# EAGLE board atum-le (EAGLE 6.5.0)
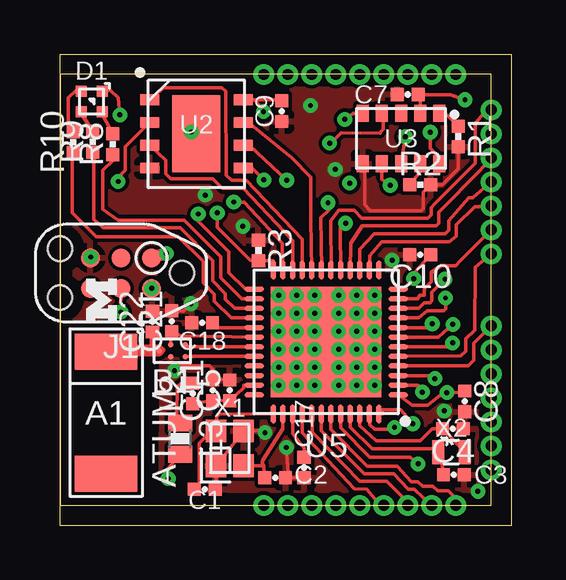
[diagram p0: board, top side]
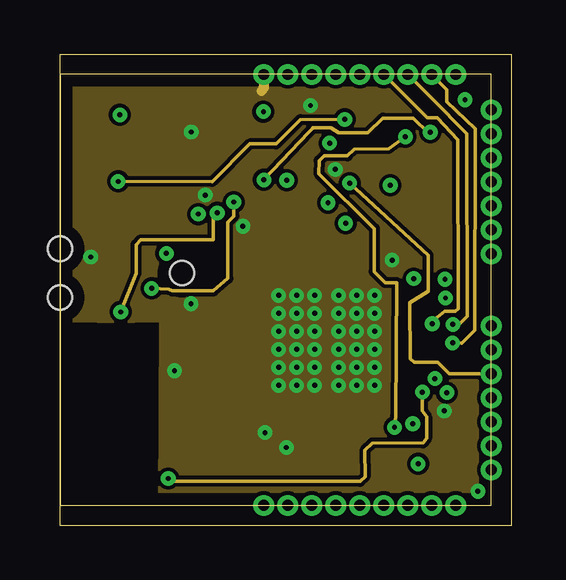
[diagram p1: board, inner layer Route2]
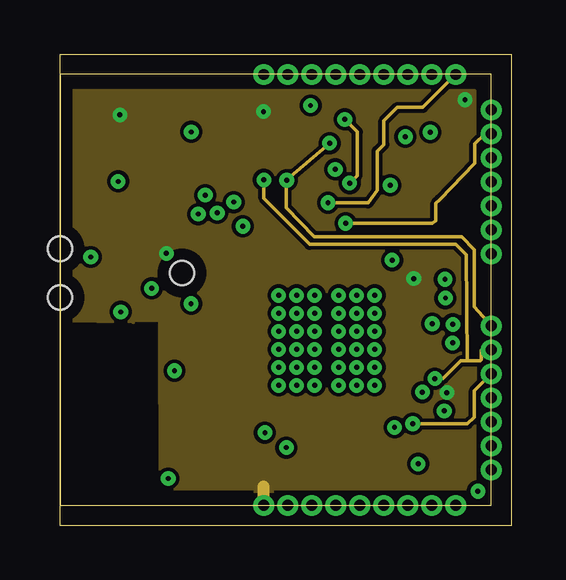
[diagram p2: board, inner layer Route15]
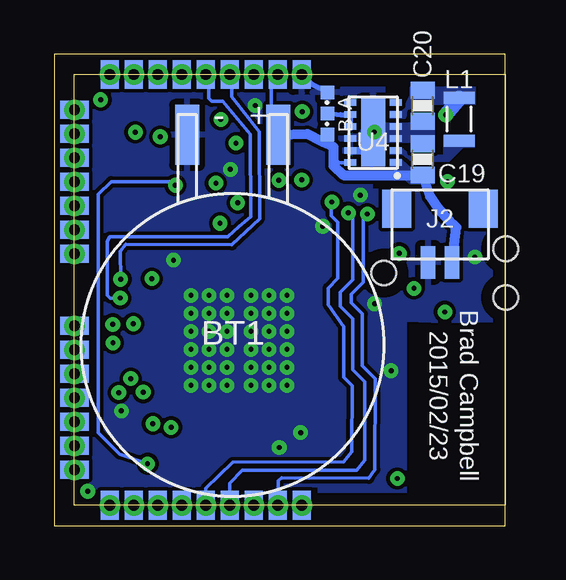
[diagram p3: board, bottom side, seen from below]

Size 17.96 x 17.96 mm. Coordinates in mm from the lower left corner, seen from the top.
Outline: 0,0 17.96,0 17.96,17.96 0,17.96 0,0
Copper layers (1+2*15+16): Top 0.0178mm / dielectric 12mil / Route2 0.0356mm / dielectric 28mil / Route15 0.0356mm / dielectric 12mil / Bottom 0.0178mm
Design rules "sunstone-4lyr_v1.0.0.3": minimum track width 6mil, minimum drill 8mil, track to track 6mil, track to pad 6mil, pad to pad 6mil, via to via 6mil, smd to smd 6mil, copper to edge 20mil, drill to drill 16mil, minimum pad ring 8mil, minimum via ring 8mil, stop-mask expansion 3mil, vias tented up to drill 0mil, thermal gap 10mil
Milling: 4 lines

## Footprints (pad centres in the part's own frame; a part is rotated, then mirrored left to right if it is on the bottom)
FRACTUS-ANTENNA-FR05-S1-N-0-102 = smd 1.5 x 2.6: 1 -2.55,0; 2 2.55,0
BAL-NRF01D3 = smd 0.22 x 0.22: ANT1 -0.537,-0.25; ANT2 -0.537,0.25; GND 0.069,0.25; SE 0.537,0; VCC 0.069,-0.25
ML-1220/F1BN = smd 2.5 x 1: NEG 8.75,1.9; POS 8.75,-1.9
0402_CAP = smd 0.536 x 0.546: 1 -0.433,0; 2 0.433,0
0603_CAP = smd 0.7 x 1: 1 -0.65,0; 2 0.65,0
1MM_SQ_4PAD = smd 0.457 x 0.457: 1 0.432,0.432; 2 0.432,-0.432; 3 -0.432,-0.432; 4 -0.432,0.432
TC2030-IDC-NL = smd 0.787 x 0.787: 1 -1.27,-0.635; 2 -1.27,0.635; 3 0,-0.635; 4 0,0.635; 5 1.27,-0.635; 6 1.27,0.635 | hole 1.016: -2.54,0; 2.54,1.016; 2.54,-1.016
SH-1X2/1MM = smd 0.6 x 1.35: 1 -0.5,0.1; 2 0.5,0.1 | smd 1.2 x 1.6: SUPPORT1 -1.8,2.335; SUPPORT2 1.8,2.335
ATUM-HEADER = drill 0.45 pad 0.754: 1 -9.479,-8.979; 2 -8.479,-8.979; 3 -7.479,-8.979; 4 -6.479,-8.979; 5 -5.479,-8.979; 6 -4.479,-8.979; 7 -3.479,-8.979; 8 -2.479,-8.979; 9 -1.479,-8.979; 10 0,-7.5; 11 0,-6.5; 12 0,-5.5; 13 0,-4.5; 14 0,-3.5; 15 0,-2.5; 16 0,-1.5; 17 0,1.5; 18 0,2.5; 19 0,3.5; 20 0,4.5; 21 0,5.5; 22 0,6.5; 23 0,7.5; 24 -1.479,8.979; 25 -2.479,8.979; 26 -3.479,8.979; 27 -4.479,8.979; 28 -5.479,8.979; 29 -6.479,8.979; 30 -7.479,8.979; 31 -8.479,8.979; 32 -9.479,8.979 | smd 0.754 x 1.2 bottom: 1B -9.479,-8.979; 2B -8.479,-8.979; 3B -7.479,-8.979; 4B -6.479,-8.979; 5B -5.479,-8.979; 6B -4.479,-8.979; 7B -3.479,-8.979; 8B -2.479,-8.979; 9B -1.479,-8.979; 24B -1.479,8.979; 25B -2.479,8.979; 26B -3.479,8.979; 27B -4.479,8.979; 28B -5.479,8.979; 29B -6.479,8.979; 30B -7.479,8.979; 31B -8.479,8.979; 32B -9.479,8.979 | smd 1.2 x 0.754 bottom: 10B 0,-7.5; 11B 0,-6.5; 12B 0,-5.5; 13B 0,-4.5; 14B 0,-3.5; 15B 0,-2.5; 16B 0,-1.5; 17B 0,1.5; 18B 0,2.5; 19B 0,3.5; 20B 0,4.5; 21B 0,5.5; 22B 0,6.5; 23B 0,7.5
MIPSZ201D = smd 0.5 x 1.3: 1 -0.9,0; 2 0.9,0
0402_RES = smd 0.536 x 0.546: 1 -0.433,0; 2 0.433,0
TDFN-8 = smd 0.45 x 0.8: 1 -1.425,-1.95; 2 -0.475,-1.95; 3 0.475,-1.95; 4 1.425,-1.95; 5 1.425,1.95; 6 0.475,1.95; 7 -0.475,1.95; 8 -1.425,1.95 | smd 3.2 x 2: NC 0,0
MICRO-CRYSTAL-C3 = smd 0.5 x 0.7: 1 -1.6,-1.05; 2 -0.8,-1.05; 3 0,-1.05; 4 0.8,-1.05; 5 1.6,-1.05; 6 1.6,1.05; 7 0.8,1.05; 8 0,1.05; 9 -0.8,1.05; 10 -1.6,1.05
R-PWSON-12 = smd 0.28 x 0.5: 1 -1.25,-0.95; 2 -0.75,-0.95; 3 -0.25,-0.95; 4 0.25,-0.95; 5 0.75,-0.95; 6 1.25,-0.95; 7 1.25,0.95; 8 0.75,0.95; 9 0.25,0.95; 10 -0.25,0.95; 11 -0.75,0.95; 12 -1.25,0.95 | smd 2.8 x 1: NC 0,0
QFN-48-6MM = smd 0.8 x 0.203: 1 -3,2.2; 2 -3,1.8; 3 -3,1.4; 4 -3,1; 5 -3,0.6; 6 -3,0.2; 7 -3,-0.2; 8 -3,-0.6; 9 -3,-1; 10 -3,-1.4; 11 -3,-1.8; 12 -3,-2.2; 25 3,-2.2; 26 3,-1.8; 27 3,-1.4; 28 3,-1; 29 3,-0.6; 30 3,-0.2; 31 3,0.2; 32 3,0.6; 33 3,1; 34 3,1.4; 35 3,1.8; 36 3,2.2 | smd 0.203 x 0.8: 13 -2.2,-3; 14 -1.8,-3; 15 -1.4,-3; 16 -1,-3; 17 -0.6,-3; 18 -0.2,-3; 19 0.2,-3; 20 0.6,-3; 21 1,-3; 22 1.4,-3; 23 1.8,-3; 24 2.2,-3; 37 2.2,3; 38 1.8,3; 39 1.4,3; 40 1,3; 41 0.6,3; 42 0.2,3; 43 -0.2,3; 44 -0.6,3; 45 -1,3; 46 -1.4,3; 47 -1.8,3; 48 -2.2,3 | smd 4.6 x 4.6: GND 0,0
RES_SWITCH = smd 0.56 x 0.56: A -0.88,0; B 0.88,0; C 0,0
FA-128 = smd 0.95 x 0.85: 1 -0.725,-0.575; 2 0.725,-0.575; 3 0.725,0.575; 4 -0.725,0.575
ABS05 = smd 0.5 x 1: A -0.55,0; B 0.55,0

## Placement (x,y rotation side)
A1  FRACTUS-2.4GHZ-FR05-S1-N-0-102  [FRACTUS-ANTENNA-FR05-S1-N-0-102]  1.91,3.86 270 top
B1  BAL-NRF01D3  [BAL-NRF01D3]  4.67,6.44 180 top
BT1  ML-1220/F1AN  [ML-1220/F1BN]  11.36,6.69 90 bottom
C1  12pF  [0402_CAP]  6.02,0.68 0 top
C2  12pF  [0402_CAP]  8.95,1.15 0 top
C3  22pF  [0402_CAP]  16.4,1.27 0 top
C4  22pF  [0402_CAP]  16.36,3.2 0 top
C5  1nF  [0402_CAP]  7.07,4.79 90 top
C7  10nF  [0402_CAP]  14.48,17.12 180 top
C8  0.1uF  [0402_CAP]  16.85,4.33 270 top
C9  0.1uF  [0402_CAP]  9.23,16.43 270 top
C10  4.7uF  [0402_CAP]  15,10.44 180 top
C11  1uF  [0402_CAP]  6.36,4.79 90 top
C17  1nF  [0402_CAP]  10.16,1.58 270 top
C18  47nF  [0402_CAP]  5.91,7.62 180 top
C19  10uF  [0603_CAP]  3.45,14.42 90 bottom
C20  10uF  [0603_CAP]  3.45,16.65 270 bottom
C21  2.2nF  [0402_CAP]  4.65,7.67 90 top
C22  0.8pF  [0402_CAP]  3.84,7.66 90 top
D1  SML-LX0404SIUPGUSB  [1MM_SQ_4PAD]  1.31,16.83 0 top
J1  TC2030-JLINK-NL  [TC2030-IDC-NL]  2.53,9.68 180 top
J2  SH_MALE_2/1MM  [SH-1X2/1MM]  2.72,10.03 0 bottom
J3  ATUM-HEADER  [ATUM-HEADER]  17.96,8.98 0 top
L1  2.2  [MIPSZ201D]  1.93,16.09 90 bottom
L2  [0402_CAP]  5.52,4.66 90 top
L3  [0603_CAP]  4.99,2.78 270 top
LOGO1  UMICH_SOLID_TINY  [UMICH_SOLID_50MIL]  1.73,8.56 90 top
R1  10k  [0402_RES]  16.58,15.37 270 top
R2  10k  [0402_RES]  15,13.36 0 top
R3  12k  [0402_RES]  8.26,10.62 270 top
R8  1k  [0402_RES]  2.18,15.05 90 top
R9  1k  [0402_RES]  1.36,15.15 90 top
R10  1k  [0402_RES]  0.55,15.13 90 top
U2  FM25LBTDFN-8  [TDFN-8]  5.68,15.48 270 top
U3  RV-3049-C3  [MICRO-CRYSTAL-C3]  14.2,15.29 180 top
U4  TPS62740  [R-PWSON-12]  5.51,15.53 90 bottom
U5  NRF51822QF  [QFN-48-6MM]  11.08,6.81 180 top
U$1  RES_SWITCH  [RES_SWITCH]  7.41,16.33 270 bottom
X1  EPSON-FA-128  [FA-128]  7.07,2.38 270 top
X2  ABS05-32.768KHZ-T  [ABS05]  16.29,2.22 0 top

## Library data of the parts
A1 = chips; RICHARDSON_RFPD: FR05-S1-N-0102B
B1 = chips; DIGIKEY: 497-13637-1-ND; MOUSER: 511-BAL-NRF01D3
BT1 = batteries; DIGIKEY: P663-nd; MOUSER: 658-ML-1220/F1BN
C1-C5 C7-C11 C17 C18 C21 C22 L1-L3 R1-R3 R8-R10 = passives
C19 C20 = passives; DIGIKEY: 490-7316-1-ND
D1 = leds; DIGIKEY: 67-2125-1-ND
J1 = connector
J2 = headers; DIGIKEY: 455-1788-2-ND
J3 = atum
LOGO1 = logos
U2 = chips; DIGIKEY: FM25L04B-DGRA-ND; MOUSER: 877-FM25L04B-DG
U3 = chips
U4 = chips; DIGIKEY: 296-37134-1-ND; MOUSER: 595-TPS62740DSST; NEWARK: 27X9745
U5 = chips; DIGIKEY: 1490-1032-1-ND; MOUSER: 949-NRF51822-QFAB-R7
U$1 = switches
X1 = crystals
X2 = crystals; DIGIKEY: 535-11899-1-ND

## Nets
!FRAM_CS: U2.1 U5.21
!FRAM_HOLD: U2.7 U5.20
!FRAM_WP: U2.3 U5.22
!RTC_INT: U3.7 U5.44
AIN3: J3.25 J3.25B U5.6
AIN4: J3.26 J3.26B U5.7
AIN5: J3.27 J3.27B U5.8
AIN6: J3.28 J3.28B U5.9
AIN7: J3.29 J3.29B U5.10
ANTENNA: A1.1 B1.SE C22.1
BATTERY: BT1.POS C19.1 J2.2 J3.31 J3.31B U4.1 U4.12 U$1.B
BOOTLOADER_CTRL: J3.24 J3.24B U5.19
BOOTLOADER_RX: J3.22 J3.22B U5.17
BOOTLOADER_TX: J3.23 J3.23B U5.18
GND: B1.GND BT1.NEG C1.2 C2.2 C3.2 C4.2 C5.2 C7.2 C8.2 C9.2 C10.2 C11.2 C17.2 C18.2 C19.2 C20.2 C21.2 C22.2 J1.5 J2.1 J3.32 J3.32B R1.2 R2.2 R3.1 U2.4 U3.6 U4.3 U4.4 U4.10 U4.11 U4.NC U$1.A X1.2 X1.4
I2C_SCL: J3.17 J3.17B U5.5
I2C_SDA: J3.18 J3.18B U5.11
LED_BLUE: R9.1 U5.27
LED_GREEN: R10.1 U5.28
LED_RED: R8.1 U5.26
N$1: J3.30 J3.30B
N$5: L1.1 U4.2
N$6: C3.1 U5.45 X2.A
N$7: D1.2 R8.2
N$8: U4.8 U4.9 U$1.C
N$9: C1.1 U5.37 X1.1
N$10: C2.1 U5.38 X1.3
N$11: D1.4 R10.2
N$12: D1.3 R9.2
N$13: C4.1 U5.46 X2.B
N$14: R2.1 U3.9
N$15: C18.1 U5.29
N$16: R1.1 U3.1
N$17: C17.1 U5.39
N$18: B1.ANT1 U5.31
N$19: B1.ANT2 U5.32
N$20: B1.VCC C21.1 U5.30
N$36: C5.1 C11.1 L2.1 U5.35 U5.36
N$37: L2.2 L3.1
N$38: L3.2 U5.2
P08: J3.19 J3.19B U5.14
P09: J3.20 J3.20B U5.15
P10: J3.21 J3.21B U5.16
P17: J3.2 J3.2B U5.25
P21: J3.6 J3.6B U5.40
P22: J3.7 J3.7B U5.41
P23: J3.8 J3.8B U5.42
P24: J3.9 J3.9B U5.43
RTC_CE: U3.8 U5.47
SPI_MISO: J3.14 J3.14B U2.2 U3.5 U5.48
SPI_MOSI: J3.15 J3.15B U2.5 U3.10 U5.3
SPI_SCK: J3.16 J3.16B U2.6 U3.4 U5.4
SWDCLK: J1.4 J3.4 J3.4B R3.2 U5.24
SWDIO/!RESET: J1.2 J3.5 J3.5B U5.23
VCC: C7.1 C8.1 C9.1 C10.1 C20.1 D1.1 J1.1 J3.1 J3.1B L1.2 U2.8 U3.2 U4.5 U5.1 U5.12

## Tracks (layer width: path | path; a pad name or v marks a point on that pad's centre or on a via)
!FRAM_CS
  Top 0.152: U2.1 4.31,17.41 6.72,17.41 6.9,17.25 6.91,13.76 7.14,13.55 7.76,13.54 10.08,11.08 U5.21
!FRAM_HOLD
  Top 0.152: U2.7 7.86,15.94 9.64,14.48 10.44,13.66 10.44,11.89 U5.20
!FRAM_WP
  Top 0.152: U2.3 4.39,14.37 4.39,13.82 4.6,13.61 6.35,13.61 6.76,13.21 7.62,13.21 9.68,11.02 U5.22
!RTC_INT  (via drill 0.2)
  Top 0.152: U5.44 11.68,3.23 12.9,2 14.59,2 v14.91,1.73 | v13.75,13.34 13.4,13.6 U3.7
  Bottom 0.152: v14.91,1.73 16.07,2.14 16.96,3.03 16.96,12.96 16.43,13.49 13.82,13.49 v13.75,13.34
AIN3  (via drill 0.2)
  Top 0.152: U5.6 16.11,6.61 v16.35,6.77
  Route2 0.152: J3.25B 16.11,17.32 16.11,16.81 17.29,15.7 17.27,7.29 16.72,6.76 v16.35,6.77
AIN4  (via drill 0.2)
  Top 0.152: U5.7 15.75,7.01 v16.36,7.54
  Route2 0.152: v16.36,7.54 16.62,7.55 16.95,7.88 16.93,15.48 16.55,15.88 15.87,16.57 J3.26
AIN5  (via drill 0.2)
  Top 0.152: U5.8 15.34,7.41 v15.5,7.57
  Route2 0.152: v15.5,7.57 15.5,7.68 16.02,8.08 16.46,8.08 16.59,8.2 16.57,15.24 15.71,16.15 15.29,16.15 J3.27
AIN6  (via drill 0.2)
  Top 0.152: U5.9 14.95,7.81 15.29,8.11 15.98,8.11 16.06,8.19 v16.05,8.64
  Bottom 0.152: v16.05,8.64 16.47,8.64 16.59,8.76 16.59,11 16.49,11.19 11.57,11.2 11.1,11.6 10.62,12.02 10.63,15.47 11.78,16.83 12.24,16.83 12.37,16.96 12.37,17.85 J3.28
AIN7  (via drill 0.2)
  Top 0.152: U5.10 14.93,8.21 15.16,8.44 15.41,8.44 15.48,8.52 15.48,8.89 v16.03,9.42
  Bottom 0.152: v16.03,9.42 16.04,10.58 15.82,10.88 11.4,10.85 10.24,11.95 10.25,15.57 11.4,17.03 11.4,17.88 J3.29
ANTENNA
  Top 0.254: B1.SE 4.25,6.48 4.1,6.44 | C22.1 3.84,6.44
  Top 0.5: A1.1 3.11,6.44 3.84,6.44 4.1,6.44
BATTERY
  Bottom 0.152: U4.12 6.93,14.28 7.16,14.52 | BT1.POS 9.35,16.21 9.75,16.61 9.75,17.82 J3.31B
  Bottom 0.203: U$1.B 7.39,15.34 7.59,15.14
  Bottom 0.406: BT1.POS 8.27,15.48 7.59,15.14 7.16,14.92 7.16,14.52 7.16,14.14 6.75,13.76 3.46,13.76 C19.1 3.13,12.88 2.84,12.44 2.35,11.89 2.04,11.58 J2.2
  pour Bottom (no thermals): 2.97,13.38 2.97,14.09 3.96,14.09 4.34,14.44 4.82,14.44 4.82,14.14 4.52,13.83 3.99,13.38
BOOTLOADER_CTRL  (via drill 0.2)
  Top 0.152: U5.19 10.89,9.83 10.85,11.98 11.19,12.3 11.18,12.57 v11.16,12.61
  Route15 0.152: v11.16,12.61 12.83,12.6 13.21,13.13 13.21,14.76 13.49,15.04 13.49,16.02 14.05,16.59 15.11,16.59 J3.24B
BOOTLOADER_RX  (via drill 0.2)
  Top 0.152: v11.89,11.75 11.68,11.56 11.67,11.42 11.67,11.44 U5.17
  Route15 0.152: J3.22 17.71,15.48 17.28,15.06 17.28,14.25 15.81,12.74 15.65,12.58 15.65,11.87 15.49,11.75 v11.89,11.75
BOOTLOADER_TX
  Top 0.152: J3.23B 17.77,16.48 17.29,15.92 17.28,14.25 15.65,12.61 15.61,12.56 15.46,12.41 15.46,12.12 15.32,11.97 12.55,11.97 12.24,12.29 12.22,12.29 11.6,12.29 11.28,11.86 11.3,9.82 U5.18
GND  (via drill 0.2)
  Top 0.152: R2.2 15.91,13.36 16.58,14.02 R1.2 | U3.6 12.68,14.16 12.68,12.52 12.92,12.28 15.04,12.28 15.13,12.37 15.13,13.05 R2.2 | 15.29,13.4 R2.2 | C5.2 6.36,5.25 | 6.36,5.25 C11.2 | v8.53,3.03 8.47,3.1 X1.4 X1.2 6.49,0.72 C1.2 | C21.2 5.13,8.08 v5.45,8.4 | 6.36,5.25 6.36,5.68 6.22,5.82 4.97,5.82 v4.76,5.61 | C17.2 C2.2 9.49,1.36 v9.42,2.41
  Top 0.508: J1.5 1.28,10.39 v1.27,10.35
  Route2 0.406: J3.32 8.48,17.37 8.38,17.27
  Bottom 0.203: U$1.A 8.05,17.53 J3.32
  Bottom 0.305: 5.76,15.78 U4.NC | 5.26,15.78 U4.NC | U4.11 5.83,14.78 5.51,15.1 U4.NC
  other vias: 11.46,14 17.4,0.59 16,3.94 7.61,11.63 13.83,10.22 10.43,16.66 9.1,8.75 9.85,8.75 10.6,8.75 13.1,8.75 11.6,8.75 12.35,8.75 11.6,8 12.35,8 13.1,8 11.6,7.25 12.35,7.25 10.6,5 9.85,5 9.1,5 10.6,5.75 9.85,5.75 9.1,5.75 10.6,6.5 9.85,6.5 9.1,6.5 10.6,7.25 9.85,7.25 9.1,7.25 9.1,8 9.85,8 10.6,8 13.1,7.25 13.1,6.5 12.35,6.5 11.6,6.5 11.6,5.75 12.35,5.75 13.1,5.75 13.1,5 12.35,5 11.6,5 6.04,12.93 5.46,15.56
  pour Top: 0.02,17.99 17.94,17.93 17.96,0 4.18,0.02 4.19,6.11 4.98,6.12 5.01,5.75 8.24,5.82 8.24,3.8 14.2,3.83 14.21,9.78 8.5,9.77 8.45,6.99 4.2,7.01 4.2,7.7 3.48,7.67 3.05,7.67 3.05,7.64 0,7.69
  pour Bottom: 5.08,18 8.79,17.96 8.79,17.14 17.14,17.14 17.27,0.71 7.75,0.81 7.75,0 4.17,0.02 4.16,7.72 3.05,7.68 3.05,7.64 0,7.69 0,17.98 1.01,18.02 1.01,13.12 5.59,13.12 5.59,16.8 5.08,16.8
  pour Route2 (no thermals): 0.02,17.99 8.1,17.92 8.13,18.47 8.81,18.47 8.85,17.93 17.93,17.92 17.94,0.01 4.15,0.03 4.18,7.68 3.06,7.69 3.05,7.88 3.06,7.64 0,7.69
  pour Bottom (no thermals): 2.94,15.94 5.59,15.94 5.59,15.1 2.94,15.1
I2C_SCL
  Top 0.152: U5.5 16.7,6.24 16.9,6.42 16.9,6.94 17.27,7.29 17.29,9.93 J3.17
I2C_SDA
  Top 0.152: U5.11 14.89,8.61 14.97,8.75 15.17,8.75 15.17,9.02 15.46,9.31 15.46,9.72 15.88,9.98 16.47,9.98 16.67,10.19 J3.18
LED_BLUE
  Top 0.152: R9.1 1.4,14.68 1.4,11.93 1.8,11.56 4.99,11.56 6.36,10.2 6.36,9.36 6.88,8.82 6.88,8.59 7.26,8.21 U5.27
LED_GREEN
  Top 0.152: R10.1 0.5,14.65 0.5,12.2 1.5,11.2 4.92,11.2 5.95,10.17 5.95,9.27 6.42,8.8 6.42,8.51 7.12,7.81 U5.28
LED_RED
  Top 0.152: 2.18,14.69 R8.1 2.2,14.69 2.2,14.39 1.77,13.96 1.77,12.34 1.78,12.33 2.01,12.17 2.41,11.88 5.16,11.88 6.69,10.36 6.68,9.49 7.56,8.61 U5.26
N$5
  pour Bottom (no thermals): 4.82,14.92 4.34,14.92 3.96,14.62 2.59,14.62 2.59,15.43 1.27,15.38 1.27,14.9 1.75,14.9 2.33,14.31 3.91,14.31 4.29,14.62 4.82,14.62
N$6
  Top 0.152: C3.1 15.86,2.3 X2.A 15.63,2.36 13.01,2.36 12.08,3.26 U5.45
N$7
  Top 0.152: R8.2 1.77,16.25 D1.2
N$8
  Bottom 0.203: U4.9 U4.8 6.87,16.28 U$1.C
N$9
  Top 0.152: U5.37 8.86,3.8 6.65,3.82 6.52,3.69 6.52,3.03 X1.1 6.31,3.1 5.79,2.58 5.79,0.88 C1.1
N$10
  Top 0.152: X1.3 8.47,1.66 | 8.47,1.66 8.42,1.77 8.44,1.89 9.28,3.2 9.29,3.77 U5.38 | C2.1 8.47,1.6 8.47,1.66
N$11
  Top 0.152: R10.2 0.34,15.77 0.34,16.98 0.66,17.3 D1.4
N$12
  Top 0.152: R9.2 0.92,16.26 D1.3
N$13
  Top 0.152: X2.B 15.85,3.29 C4.1 15.5,3.2 15.01,2.7 13.16,2.7 12.47,3.31 12.48,3.87 U5.46
N$14
  Top 0.152: R2.1 15,13.91 U3.9
N$15
  Top 0.152: U5.29 6.45,7.41 C18.1
N$16
  Top 0.152: U3.1 16.04,16.34 R1.1
N$17
  Top 0.152: U5.39 9.68,2.98 10.16,2.38 C17.1
N$18
  Top 0.152: B1.ANT1 5.26,6.62 8.24,6.62 U5.31
N$19
  Top 0.152: U5.32 5.29,6.22 B1.ANT2
N$20
  Top 0.152: B1.VCC 4.6,7.17 C21.1 4.79,7.22 5.01,7.06 8.23,7.01 U5.30
N$36
  Top 0.152: U5.36 U5.35 7.79,5.01 7.65,5 7.65,4.91 C5.1 6.38,4.39 C11.1 5.52,4.26 L2.1
N$37
  Top 0.152: L2.2 5.11,5.12 4.87,4.96 4.86,3.76 L3.1
N$38  (via drill 0.2)
  Top 0.152: U5.2 14.89,5.01 v15.09,4.72 | v4.5,1.12 4.51,1.54 L3.2
  Route2 0.152: v15.09,4.72 15.09,3.95 15.27,3.69 15.27,2.79 15.12,2.6 12.99,2.59 12.69,2.29 12.7,1.2 12.5,1 4.65,1 v4.5,1.12
P08
  Top 0.152: J3.19 17.93,12.45 17.27,12.45 16.51,11.68 16.51,11.21 16.22,10.98 13.39,10.99 12.89,10.41 U5.14
P09
  Top 0.152: J3.20 17.19,12.81 17.03,12.81 16.2,11.87 16.2,11.46 16.04,11.32 13.08,11.31 12.48,10.67 U5.15
P10
  Top 0.152: J3.21 17.59,14.07 17.52,13.98 15.77,12.21 15.77,11.75 15.66,11.66 15.52,11.65 12.86,11.65 12.58,11.66 12.1,10.93 12.08,9.78 U5.16
P17  (via drill 0.2)
  Top 0.152: U5.25 7.72,9.01 7.03,9.7 7.03,10.56 5.75,11.84 v5.75,12.14
  Bottom 0.152: J3.2B 9.47,1.03 9.32,1.15 5.69,1.13 5.44,1.49 5.43,5.28 5.96,5.81 5.96,7.98 6.42,8.44 6.42,8.8 5.93,9.29 5.93,11.96 v5.75,12.14
P21
  Top 0.152: J3.6 13.34,0 12.78,0.68 12.25,0.69 10.08,3.02 U5.40
P22
  Top 0.152: J3.7 14.48,0.12 13.61,1 12.47,1 10.49,3.04 10.49,3.9 U5.41
P23
  Top 0.152: J3.8B 15.45,0 14.74,0.68 14.49,0.68 13.89,1.31 12.67,1.31 10.88,3.12 10.88,3.9 U5.42
P24
  Top 0.152: J3.9B 16.48,0.29 16.17,0.6 15.75,0.6 15.73,0.62 15.52,0.8 15.11,0.8 14.89,0.99 14.63,0.99 14.04,1.63 12.79,1.63 11.27,3.17 11.27,3.93 U5.43
RTC_CE  (via drill 0.2)
  Top 0.152: U3.8 14.21,14.25 v14.38,15.36 | v13.93,3.25 13.89,3.18 13.11,3.18 12.89,3.35 12.88,3.84 U5.47
  Route2 0.152: v14.38,15.36 13.68,14.86 12.24,14.84 11.96,14.56 11.01,14.56 10.79,14.37 10.78,13.82 13.09,11.53 13.08,9.74 13.54,9.28 14.02,9.28 13.97,3.73 v13.93,3.25
SPI_MISO  (via drill 0.2)
  Top 0.152: U3.5 12.22,16.35 v11.86,16.09 | v2.41,13.5 2.41,13.67 2.71,13.97 2.71,14.94 U2.2 | U5.48 13.43,3.81 13.43,3.98 14.18,3.98 v14.69,3.4
  Route2 0.152: v2.41,13.5 6.33,13.49 7.9,15.06 9,15.06 10.01,16.07 11.61,16.08 v11.86,16.09 | J3.14B 16.21,5.48 15.73,5.96 14.74,5.96 14.59,6.11 14.57,8.44 15.33,8.92 15.33,10.43 v12.06,13.43
  Route15 0.152: v14.69,3.4 16.96,3.4 17.26,3.67 17.26,4.78 J3.14B | v12.06,13.43 12.37,13.74 12.37,13.98 12.38,15.56 v11.86,16.09
SPI_MOSI  (via drill 0.2)
  Top 0.152: U2.5 7.9,14.04 | 7.93,14.04 U2.5 | v8.48,13.56 8,14.04 U2.5 | U3.10 15.8,14.5 15.42,14.88 v15.42,15.54 | U5.3 15.49,5.41 v15.61,5.28
  Route2 0.152: v8.48,13.56 10.36,15.55 10.49,15.69 10.53,15.73 11.27,15.73 11.61,15.52 12.82,15.52 13.44,16.14 14.71,16.14 15.35,15.5 15.36,15.54 v15.42,15.54
  Route15 0.152: v8.48,13.56 8.48,12.8 10.39,10.88 16.47,10.88 16.92,10.45 16.96,6.02 16.69,6.02 | 16.69,6.02 17.5,6.02 17.54,6.06 17.54,6.47 J3.15B | v15.61,5.28 15.97,5.29 16.69,6.02
SPI_SCK  (via drill 0.2)
  Top 0.152: 7.87,14.99 U2.6 7.9,14.99 v9.44,13.55 | v11.22,15.1 11.24,15.06 11.7,15.52 11.7,15.53 13.32,15.52 13.45,15.67 13.45,16.28 U3.4 | U5.4 14.24,5.82 14.39,5.82 17.01,5.82 17.23,6.05 17.23,6.75 J3.16
  Route15 0.152: v11.22,15.1 9.44,13.57 v9.44,13.55 9.41,13.54 9.43,13.5 9.43,12.41 10.58,11.2 16.73,11.18 17.26,10.65 17.25,8.28 J3.16 17.96,7.37
SWDCLK  (via drill 0.2)
  Top 0.152: U5.24 8.88,10.19 8.86,10.2 8.35,10.2 R3.2 | R3.2 8.33,10.27 | 2.53,9.09 J1.4 v2.52,8.06 | v6.54,12.19 6.54,11.59 7.73,10.4 7.92,10.22 R3.2
  Route2 0.152: v2.52,8.06 3.16,9.67 3.16,10.87 3.35,11.06 6.37,11.06 6.37,12.02 v6.54,12.19
  Bottom 0.152: J3.4 11.48,0.93 10.96,1.46 6.19,1.46 5.86,1.89 5.86,5.16 6.36,5.66 6.36,7.78 6.88,8.3 6.88,8.89 6.37,9.4 6.37,12.02 v6.54,12.19
SWDIO/!RESET  (via drill 0.2)
  Top 0.152: U5.23 9.26,10.92 7.67,12.64 v7.23,12.64 | J1.2 v3.81,9.04
  Route2 0.152: v3.81,9.04 4.52,9 4.66,8.94 6.38,8.94 6.98,9.46 6.98,11.8 7.23,12.05 v7.23,12.64
  Bottom 0.152: J3.5 12.48,0.72 11.36,1.79 6.73,1.81 6.4,2.24 6.39,4.98 6.74,5.33 6.74,7.45 7.39,8.36 7.39,9.05 6.98,9.46 6.98,11.8 7.25,12.07 7.25,12.62 v7.23,12.64
VCC  (via drill 0.2)
  Top 0.152: U3.2 15.01,16.35 15.01,17.07 C7.1 | C7.1 15.06,17.2 | C7.1 15.14,17.12 16.26,17.12 v16.86,16.9 | D1.1 2.09,17.3 2.41,16.98 v2.48,16.27 | U2.8 8.08,16.89 | 8.08,16.89 9.02,16.89 9.14,17.02 9.14,16.97 C9.1 | v8.47,16.41 8.36,16.61 8.08,16.89 | C8.1 16.76,4.68 16.67,4.71 v16.11,4.7 15.96,4.69 15.31,4.17 14.67,4.17 U5.1 | U5.12 14.29,9.01 v14.73,9.45 14.73,9.68 C10.1
  Top 0.508: J1.1 3.75,10.35 v4.42,10.5
  Route15 0.508: J3.1B 8.48,0.77 8.46,0.79
  Bottom 0.61: L1.2 1.9,16.97 v2.48,16.27
  pour Route15 (no thermals): 0,17.27 17.27,17.27 17.3,6.47 17.3,6.33 17.27,0.69 8.84,0.69 8.84,-0.51 8.13,-0.51 8.13,0.69 4.17,0.68 4.14,7.7 3.04,7.69 3.05,7.61 3.05,7.64 0,7.69
  pour Bottom (no thermals): 4.82,16.12 4.16,16.12 3.83,16.7 1.24,16.7 1.24,17.74 3.99,17.74 3.99,17.11 4.29,16.45 4.82,16.45

## Text on the board
tPlace: ATUM
bPlace: + | - | Brad Campbell | 2015/02/23